# EAGLE board TDSensorBoard (EAGLE 7.6.0)
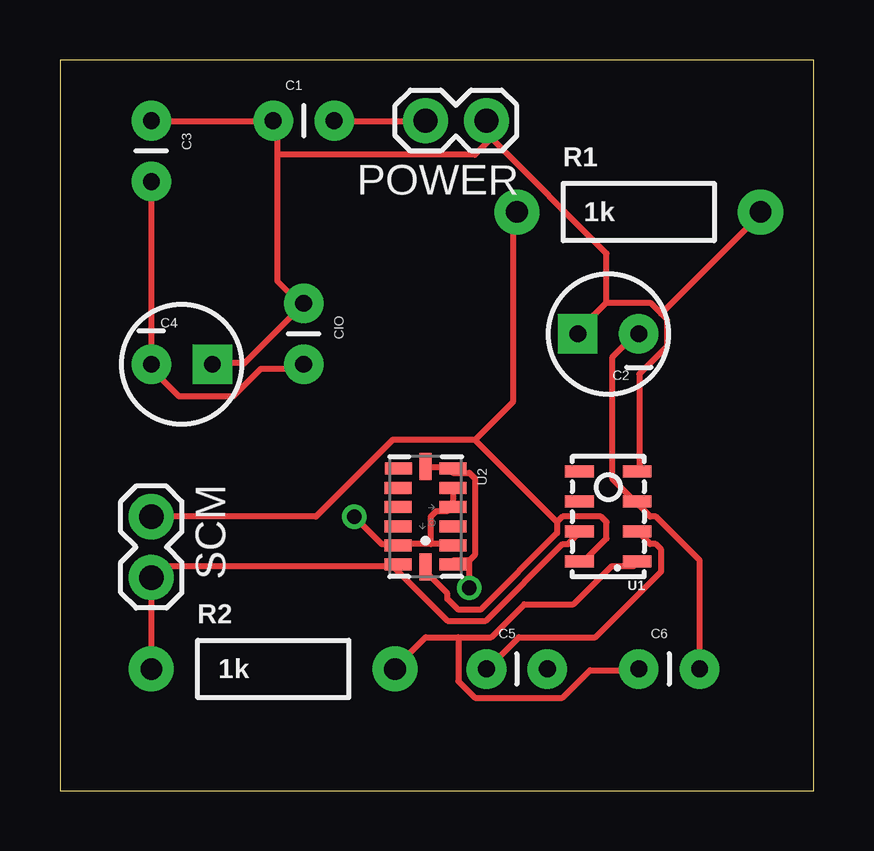
[diagram p0: board, top side]
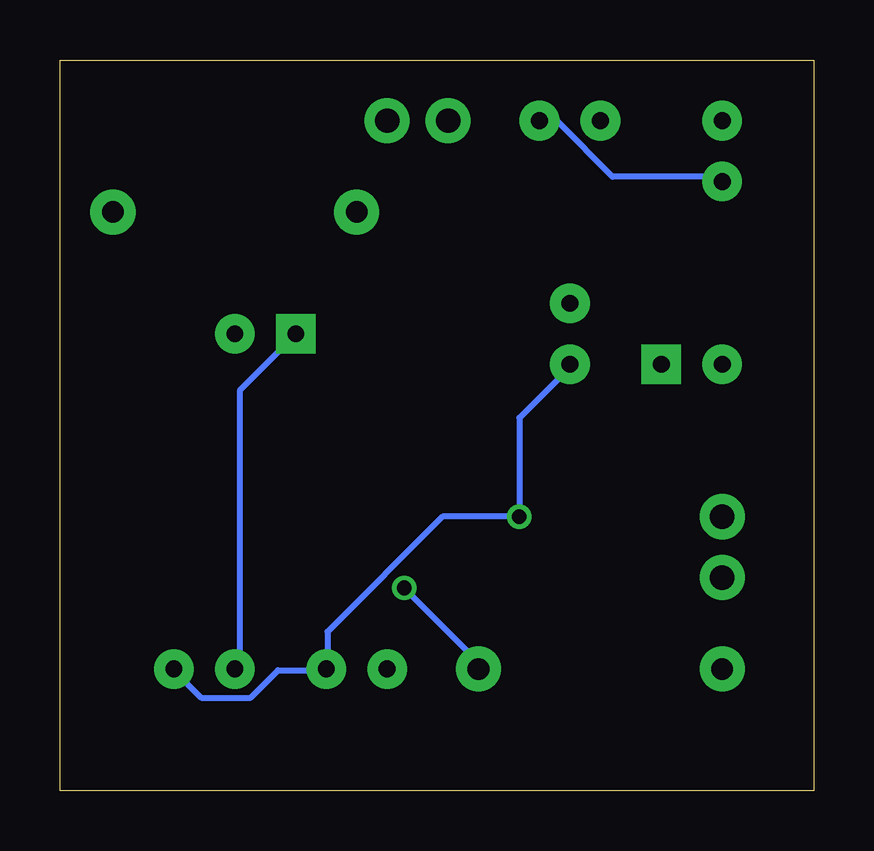
[diagram p1: board, bottom side, seen from below]

Size 31.42 x 30.47 mm. Coordinates in mm from the lower left corner, seen from the top.
Outline: 0,0 31.42,0 31.42,30.47 0,30.47 0,0
Copper layers (1*16): Top 0.035mm / dielectric 1.5mm / Bottom 0.035mm
Design rules "default": minimum track width 10mil, minimum drill 24mil, track to track 8mil, track to pad 8mil, pad to pad 8mil, via to via 8mil, smd to smd 8mil, copper to edge 40mil, drill to drill 8mil, minimum pad ring 10mil, minimum via ring 8mil, stop-mask expansion 4mil, vias tented up to drill 0mil, thermal gap 10mil

## Footprints (pad centres in the part's own frame; a part is rotated, then mirrored left to right if it is on the bottom)
CAP-PTH-SMALL = drill 0.7 pad 1.651: 1 0,0; 2 2.54,0
CPOL-RADIAL-10UF-25V = drill 0.7 pad 1.651 square: 1 1.27,0 | drill 0.7 pad 1.651: 2 -1.27,0
1X02 = drill 1.016 pad 1.88: 1 0,0; 2 2.54,0
AXIAL-0.4 = drill 0.9 pad 1.88: P$1 -5.08,0; P$2 5.08,0
LGA8 = smd 1.2 x 0.5: 1 -1.2,1.875; 2 -1.2,0.625; 3 -1.2,-0.625; 4 -1.2,-1.875; 5 1.2,-1.875; 6 1.2,-0.625; 7 1.2,0.625; 8 1.2,1.875
LGA14_1:1_PATRICK = smd 0.5 x 1.124: 1 2,1.138; 2 1.2,1.138; 3 0.4,1.138; 4 -0.4,1.138; 5 -1.2,1.138; 6 -2,1.138; 8 -2,-1.13; 9 -1.2,-1.138; 10 -0.4,-1.138; 11 0.4,-1.138; 12 1.2,-1.138; 13 2,-1.138 | smd 1.124 x 0.5: 7 -2.1,0; 14 2.1,0

## Placement (x,y rotation side)
C1  0.1uF  [CAP-PTH-SMALL]  8.89,27.94 0 top
C2  10uF  [CPOL-RADIAL-10UF-25V]  22.86,19.05 180 top
C3  0.1uF  [CAP-PTH-SMALL]  3.81,27.94 270 top
C4  10uF  [CPOL-RADIAL-10UF-25V]  5.08,17.78 0 top
C5  0.1uF  [CAP-PTH-SMALL]  17.78,5.08 0 top
C6  1uF  [CAP-PTH-SMALL]  24.13,5.08 0 top
CIO  0.1uF  [CAP-PTH-SMALL]  10.16,20.32 270 top
POWER  [1X02]  17.78,27.94 180 top
R1  1k  [AXIAL-0.4]  24.13,24.13 0 top
R2  1k  [AXIAL-0.4]  8.89,5.08 0 top
SCM  [1X02]  3.81,11.43 270 top
U1  MPL3115A2LGA8  [LGA8]  22.86,11.43 180 top
U2  ADXL345PATRICK  [LGA14_1:1_PATRICK]  15.24,11.43 270 top

## Library data of the parts
C1-C6 CIO R1 R2 = SparkFun-Passives
POWER SCM = SparkFun-Connectors
U1 = SparkFun-Sensors
U2 = Testing

## Nets
GND: C1.2 C2.2 C3.2 C4.2 C5.2 C6.2 CIO.2 POWER.2 U1.3 U2.2 U2.4 U2.5 U2.12
INT1: U1.6
INT2: U1.5
N$1: C5.1 U1.2
SCL: R1.P$1 SCM.1 U1.8 U2.14
SDA: R2.P$1 SCM.2 U1.7 U2.13
VCC_3.3V: C1.1 C2.1 C3.1 C4.1 C6.1 CIO.1 POWER.1 R1.P$2 R2.P$2 U1.1 U1.4 U2.1 U2.6 U2.7

## Tracks (layer width: path | path; a pad name or v marks a point on that pad's centre or on a via)
GND  (via drill 0.61)
  Top 0.254: C2.2 23.93,18.97 23.01,18.06 23.01,13.03 23.93,12.12 U1.3 24.15,11.89 24.61,11.43 24.84,11.43 26.67,9.6 C6.2 | U2.5 16.38,12.57 16.38,11.89 U2.4 16.15,11.66 15.7,11.66 15.47,11.43 15.47,10.29 | 15.47,10.29 16.15,10.29 U2.2 | 15.47,10.29 14.33,10.29 U2.12 14.1,10.29 13.41,10.29 v12.27,11.43 | C1.2 11.58,27.89 15.24,27.89 POWER.2 | C3.2 C4.2 3.81,17.6 4.95,16.46 7.24,16.46 8.38,17.6 9.98,17.6 CIO.2
  Bottom 0.254: C6.2 26.67,5.03 25.53,3.89 23.47,3.89 22.33,5.03 20.5,5.03 C5.2 20.27,5.26 20.27,6.63 15.47,11.43 v12.27,11.43 12.27,15.54 10.21,17.6 CIO.2 | C1.2 11.35,27.89 10.67,27.89 8.38,25.6 3.81,25.6 C3.2
N$1
  Top 0.254: U1.2 24.15,10.74 24.61,10.29 24.84,10.29 25.07,10.06 25.07,9.14 22.33,6.4 19.13,6.4 17.98,5.26 C5.1
SCL
  Top 0.254: 20.73,11.2 20.73,10.74 17.53,7.54 16.61,7.54 16.15,8 16.15,8.23 15.24,9.14 U2.14 | 20.73,11.2 20.95,11.43 22.55,11.43 22.78,11.2 22.78,10.52 21.87,9.6 U1.8 | SCM.1 10.67,11.43 13.87,14.63 17.3,14.63 | 20.73,11.2 17.3,14.63 | 17.3,14.63 18.9,16.23 18.9,24 R1.P$1
SDA
  Top 0.254: 13.87,9.37 4.27,9.37 3.81,8.91 SCM.2 R2.P$1 | 13.87,9.37 14.1,9.37 U2.13 13.87,9.37 | 13.87,9.37 16.15,7.09 17.75,7.09 20.95,10.29 21.18,10.29 21.64,10.74 U1.7
VCC_3.3V  (via drill 0.61)
  Top 0.254: 17.07,9.6 16.38,9.6 U2.1 | 17.07,9.6 17.3,9.83 17.3,13.03 17.07,13.26 16.38,13.26 U2.6 16.15,13.49 15.24,13.49 U2.7 | 16.61,6.4 15.24,6.4 14.1,5.26 R2.P$2 | 16.61,6.4 17.98,6.4 19.36,7.77 21.41,7.77 23.01,9.37 23.93,9.37 U1.1 | v17.07,8.46 17.07,9.6 | 16.61,6.4 16.61,4.57 17.3,3.89 20.95,3.89 22.1,5.03 23.93,5.03 C6.1 | C3.1 3.81,27.89 8.84,27.89 C1.1 9.07,27.89 9.07,26.52 | C4.1 6.55,17.83 7.7,17.83 9.98,20.12 CIO.1 9.98,20.34 9.07,21.26 9.07,26.52 | 25.07,19.89 24.61,20.34 22.78,20.34 | 25.07,19.89 25.3,19.66 25.3,18.52 24.15,17.37 24.15,13.49 U1.4 | 22.78,20.34 21.64,19.2 C2.1 | 17.98,27.2 17.98,27.89 POWER.1 17.98,27.2 | 17.98,27.2 22.78,22.4 22.78,20.34 | 25.07,19.89 29.18,24 R1.P$2 | 9.07,26.52 17.3,26.52 17.98,27.2
  Bottom 0.254: v17.07,8.46 13.87,5.26 R2.P$2 | C6.1 23.93,5.26 23.93,16.69 21.64,18.97 C2.1